# EAGLE board shield2 (EAGLE 8.5.2)
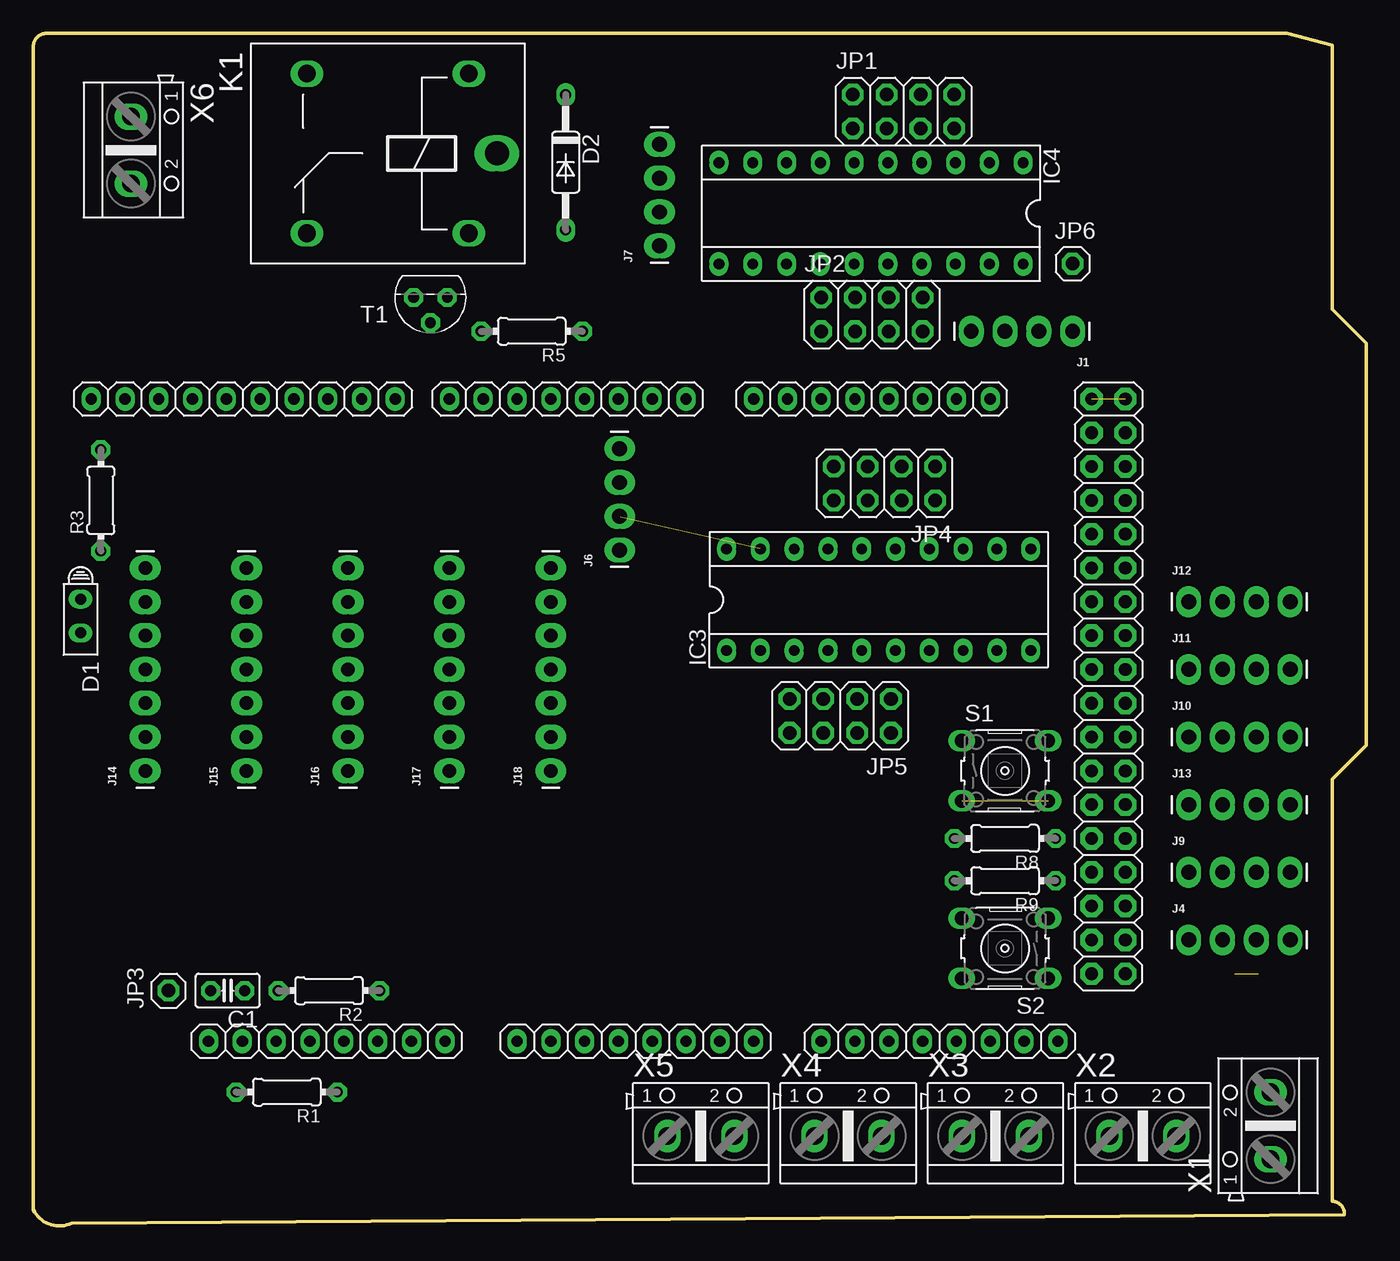
[diagram p0: board, top side]
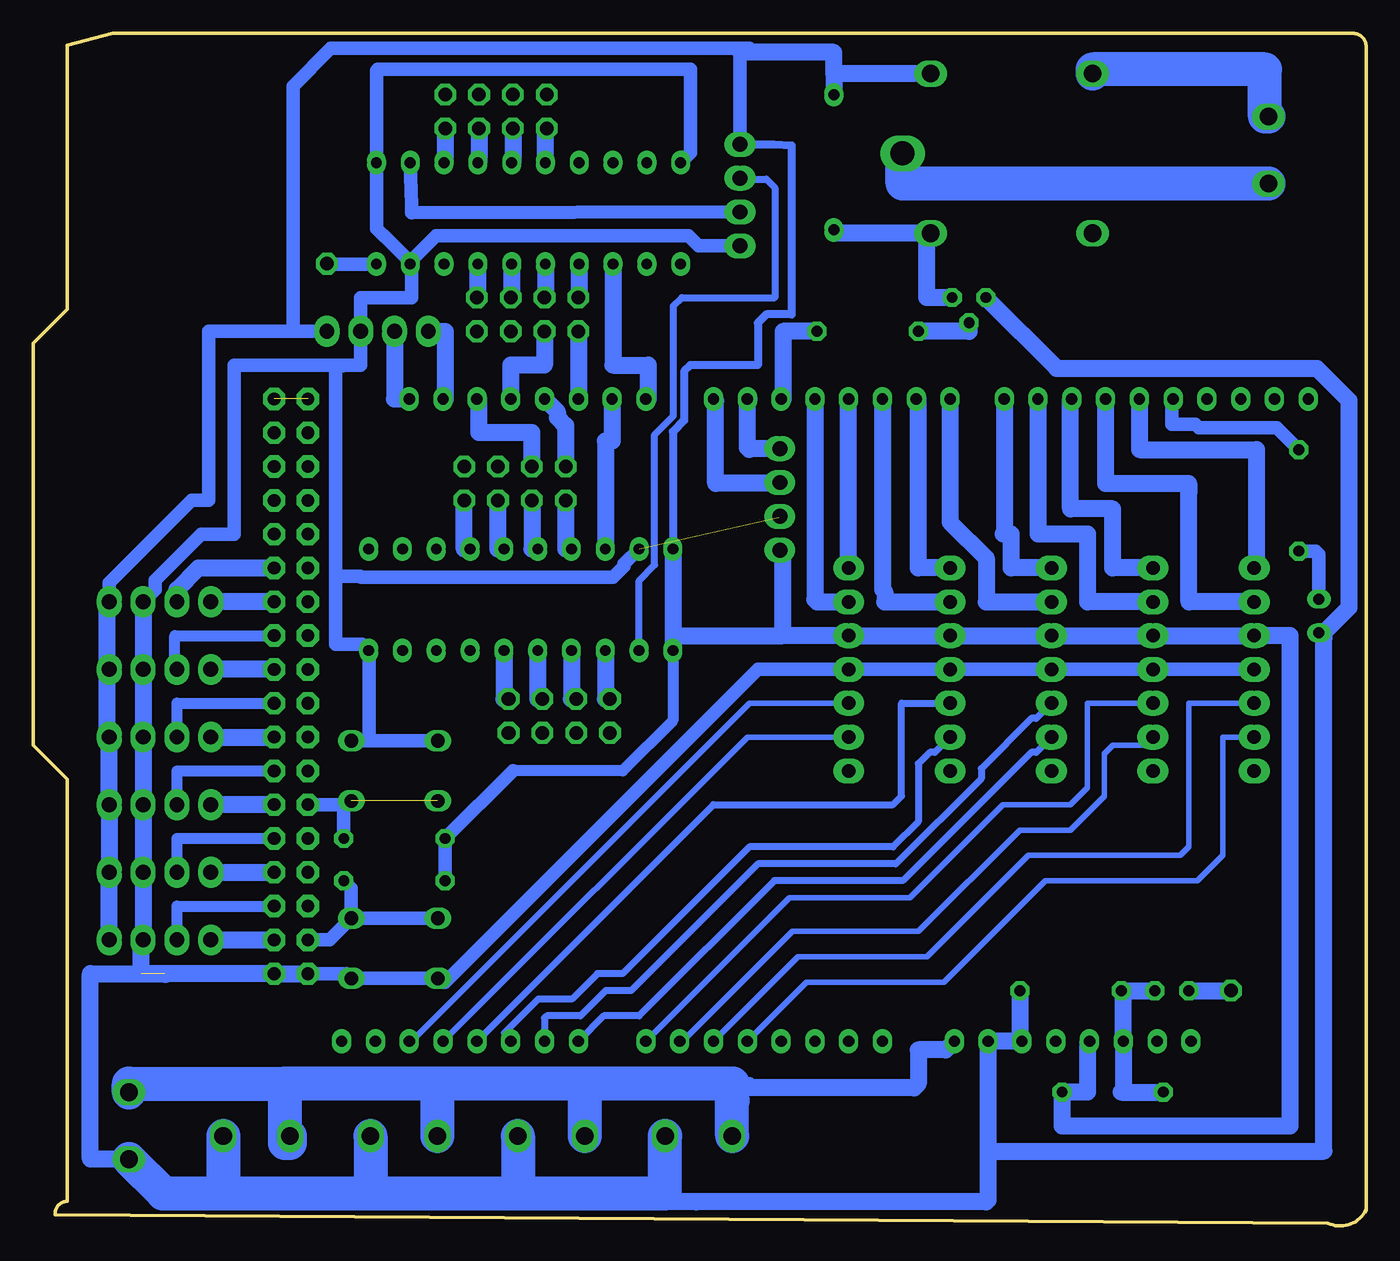
[diagram p1: board, bottom side, seen from below]

Size 100.17 x 89.6 mm. Coordinates in mm from the lower left corner, seen from the top.
Outline: 94.21,89.6 97.64,88.71 97.64,68.86 100.17,66.32 100.17,36.09 97.64,33.55 97.64,1.85 arc-90 98.54,0.85 2.9,0.22 arc-90 0,1.22 0,88.6 arc-90 1,89.6 94.21,89.6
Copper layers (1*16): Top 0.035mm / dielectric 1.6mm / Bottom 0.035mm
Design rules "default *": minimum track width 8mil, minimum drill 16mil, track to track 8mil, track to pad 8mil, pad to pad 8mil, via to via 8mil, smd to smd 6mil, copper to edge 20mil, drill to drill 12mil, minimum pad ring 12mil, minimum via ring 8mil, stop-mask expansion 2mil, vias tented up to drill 25mil, thermal gap 8mil
Net classes: 0 default: width 0.203 mm, drill 0.406 mm, clearance 0.203 mm; 1 USB: width 0.203 mm, drill 0.406 mm, clearance 0.203 mm; 2 gnd: width 0.203 mm, drill 0.406 mm, clearance 0.203 mm; 3 usbvcc: width 0.203 mm, drill 0.406 mm, clearance 0.203 mm; 4 USBpair: width 0.254 mm, drill 0.406 mm, clearance 0.61 mm

## Footprints (pad centres in the part's own frame; a part is rotated, then mirrored left to right if it is on the bottom)
1X08 = drill 0.85 pad 1.422 long: 1 -8.89,0; 2 -6.35,0; 3 -3.81,0; 4 -1.27,0; 5 1.27,0; 6 3.81,0; 7 6.35,0; 8 8.89,0
C025-025X050 = drill 0.813 octagon: 1 -1.27,0; 2 1.27,0
HLMP6 = drill 0.813 long: A -1.27,0; K 1.27,0
DO35-10 = drill 0.813 long: A 5.08,0; C -5.08,0
SOCKET-20 = drill 0.813 long: 1 -11.43,-3.81; 2 -8.89,-3.81; 3 -6.35,-3.81; 4 -3.81,-3.81; 5 -1.27,-3.81; 6 1.27,-3.81; 7 3.81,-3.81; 8 6.35,-3.81; 9 8.89,-3.81; 10 11.43,-3.81; 11 11.43,3.81; 12 8.89,3.81; 13 6.35,3.81; 14 3.81,3.81; 15 1.27,3.81; 16 -1.27,3.81; 17 -3.81,3.81; 18 -6.35,3.81; 19 -8.89,3.81; 20 -11.43,3.81
1X04_LONGPADS = drill 1.118 pad 1.88 long: 1 0,0; 2 2.54,0; 3 5.08,0; 4 7.62,0
1X07_LONGPADS = drill 1.016 pad 1.88 long: 1 0,0; 2 2.54,0; 3 5.08,0; 4 7.62,0; 5 10.16,0; 6 12.7,0; 7 15.24,0
2X04 = drill 1.016 octagon: 1 -3.81,-1.27; 2 -3.81,1.27; 3 -1.27,-1.27; 4 -1.27,1.27; 5 1.27,-1.27; 6 1.27,1.27; 7 3.81,-1.27; 8 3.81,1.27
1X01 = drill 1.016 octagon: 1 0,0
ZF112 = drill 1.321 long: 1 -6.096,5.994; 2 -6.096,-5.994; O 6.096,5.994; S 6.096,-5.994 | drill 1.803 long: P -8.204,0
1X10 = drill 0.85 pad 1.422 long: 1 -11.43,0; 2 -8.89,0; 3 -6.35,0; 4 -3.81,0; 5 -1.27,0; 6 1.27,0; 7 3.81,0; 8 6.35,0; 9 8.89,0; 10 11.43,0
0204/7 = drill 0.813 octagon: 1 -3.81,0; 2 3.81,0
B3F-10XX = drill 1.016 long: 1 -3.251,2.261; 2 3.251,2.261; 3 -3.251,-2.261; 4 3.251,-2.261
TO92 = drill 0.813 octagon: 1 1.27,0; 2 0,1.905; 3 -1.27,0
AK500/2 = drill 1.321 long: 1 -2.515,0; 2 2.515,0
2X18 = drill 0.95 pad 1.676 octagon: 1 -21.59,-1.27; 2 -21.59,1.27; 3 -19.05,-1.27; 4 -19.05,1.27; 5 -16.51,-1.27; 6 -16.51,1.27; 7 -13.97,-1.27; 8 -13.97,1.27; 9 -11.43,-1.27; 10 -11.43,1.27; 11 -8.89,-1.27; 12 -8.89,1.27; 13 -6.35,-1.27; 14 -6.35,1.27; 15 -3.81,-1.27; 16 -3.81,1.27; 17 -1.27,-1.27; 18 -1.27,1.27; 19 1.27,-1.27; 20 1.27,1.27; 21 3.81,-1.27; 22 3.81,1.27; 23 6.35,-1.27; 24 6.35,1.27; 25 8.89,-1.27; 26 8.89,1.27; 27 11.43,-1.27; 28 11.43,1.27; 29 13.97,-1.27; 30 13.97,1.27; 31 16.51,-1.27; 32 16.51,1.27; 33 19.05,-1.27; 34 19.05,1.27; 35 21.59,-1.27; 36 21.59,1.27

## Placement (x,y rotation side)
ADCH  8x1F-H8.5  [1X08]  68.11,13.87 0 top
ADCL  8x1F-H8.5  [1X08]  45.24,13.87 0 top
C1  [C025-025X050]  14.61,17.68 180 top
COMMUNICATION  8x1F-H8.5  [1X08]  63.02,62.13 180 top
D1  HLMP6  [HLMP6]  3.56,45.82 270 top
D2  1N4446  [DO35-10]  40.01,79.91 270 top
IC3  [SOCKET-20]  63.53,47.04 0 top
IC4  [SOCKET-20]  62.96,76.07 180 top
J1  [1X04_LONGPADS]  78.11,67.21 180 top
J4  [1X04_LONGPADS]  86.83,21.49 0 top
J6  [1X04_LONGPADS]  44.07,50.78 90 top
J7  [1X04_LONGPADS]  47.07,73.64 90 top
J9  [1X04_LONGPADS]  86.83,26.57 0 top
J10  [1X04_LONGPADS]  86.83,36.73 0 top
J11  [1X04_LONGPADS]  86.83,41.81 0 top
J12  [1X04_LONGPADS]  86.83,46.89 0 top
J13  [1X04_LONGPADS]  86.83,31.65 0 top
J14  [1X07_LONGPADS]  8.41,34.19 90 top
J15  [1X07_LONGPADS]  16.04,34.19 90 top
J16  [1X07_LONGPADS]  23.66,34.19 90 top
J17  [1X07_LONGPADS]  31.27,34.19 90 top
J18  [1X07_LONGPADS]  38.9,34.19 90 top
JP1  [2X04]  65.41,83.72 0 top
JP2  [2X04]  63.02,68.48 0 top
JP3  [1X01]  10.16,17.68 90 top
JP4  [2X04]  63.98,55.78 180 top
JP5  [2X04]  60.65,38.32 180 top
JP6  [1X01]  78.11,72.29 0 top
K1  ZF112  [ZF112]  26.64,80.57 180 top
POWER  8x1F-H8.5  [1X08]  22.07,13.87 180 top
PWMH  10x1F-H8.5  [1X10]  15.78,62.13 180 top
PWML  8x1F-H8.5  [1X08]  40.16,62.13 180 top
R1  [0204/7]  19.05,10.06 180 top
R2  [0204/7]  22.23,17.68 180 top
R3  [0204/7]  5.08,54.51 90 top
R5  [0204/7]  37.47,67.21 180 top
R8  [0204/7]  73.03,29.11 180 top
R9  [0204/7]  73.03,25.93 180 top
S1  [B3F-10XX]  73.03,34.19 0 top
S2  [B3F-10XX]  73.03,20.85 180 top
T1  BC547  [TO92]  29.84,69.75 180 top
X1  [AK500/2]  92.99,7.53 90 top
X2  [AK500/2]  83.39,6.77 0 top
X3  [AK500/2]  72.31,6.77 0 top
X4  [AK500/2]  61.24,6.77 0 top
X5  [AK500/2]  50.16,6.77 0 top
X6  [AK500/2]  7.34,80.82 270 top
XIO  18x2F-H8.5  [2X18]  80.81,40.54 270 top

## Library data of the parts
ADCH ADCL COMMUNICATION POWER PWMH PWML XIO = SmartPrj
C1 R1-R3 R5 R8 R9 = rcl
D1 = display-hp; MF: AGILENT TECHNOLOGIES; MPN: HLMP-6500; OC_FARNELL: 1652490; OC_NEWARK: 40K0088
D2 = diode
IC3 IC4 = ic-package
J1 J4 J6 J7 J9-J13 = SparkFun-Connectors; PROD_ID: CONN-09696
J14-J18 = SparkFun-Connectors
JP1-JP6 = pinhead
K1 = relay; OC_FARNELL: unknown; OC_NEWARK: unknown
S1 S2 = switch-omron; MPN: B3F-1000; OC_FARNELL: 176432; OC_NEWARK: 36M3542
T1 = transistor
X1-X6 = con-ptr500; OC_FARNELL: unknown; OC_NEWARK: unknown

## Nets
GND: D1.K IC3.10 IC3.19 IC4.1 IC4.10 IC4.19 J1.2 J4.3 J6.2 J7.1 J9.3 J10.3 J11.3 J12.3 J13.3 J14.4 J15.4 J16.4 J17.4 J18.4 POWER.2 POWER.3 R2.1 S1.1 S1.2 S2.1 S2.2 T1.1 X1.1 X2.2 X3.2 X4.2 X5.2 XIO.35 XIO.36
N$1: J14.6 PWMH.4
N$3: K1.S X6.1
N$4: K1.P X6.2
N$5: J4.1 XIO.34
N$6: J4.2 XIO.32
N$7: J15.6 PWMH.2
N$8: J9.1 XIO.30
N$9: COMMUNICATION.3 JP4.5
N$10: J9.2 XIO.28
N$11: J13.2 XIO.24
N$12: POWER.1 X1.2 X2.1 X3.1 X4.1 X5.1
N$13: J13.1 XIO.26
N$14: J10.2 XIO.20
N$15: J10.1 XIO.22
N$16: J11.2 XIO.16
N$17: J11.1 XIO.18
N$18: J12.2 XIO.12
N$19: R5.2 T1.2
N$20: C1.2 JP3.1
N$21: J16.7 PWMH.1
N$22: J14.7 PWMH.5
N$23: J15.7 PWMH.3
N$24: J17.7 PWML.7
N$25: J16.6 PWML.8
N$26: J17.6 PWML.6
N$27: J18.6 PWML.4
N$28: ADCL.6 J14.3
N$29: ADCL.5 J14.2
N$30: ADCH.6 J18.3
N$31: ADCH.5 J18.2
N$32: ADCH.4 J17.3
N$33: D1.A R3.1
N$34: ADCH.3 J17.2
N$35: ADCH.2 J16.3
N$36: ADCH.1 J16.2
N$37: ADCL.8 J15.3
N$38: PWMH.6 R3.2
N$39: C1.1 POWER.6 R1.2 R2.2
N$40: ADCL.7 J15.2
N$41: J18.7 PWML.5
N$42: COMMUNICATION.1 J1.3
N$43: IC4.17 JP2.8
N$44: IC4.16 JP2.6
N$45: IC4.15 JP2.4
N$46: IC4.14 JP2.2
N$47: IC3.6 JP5.1
N$48: IC3.5 JP5.3
N$49: IC3.4 JP5.5
N$50: IC3.3 JP5.7
N$51: IC3.17 JP4.8
N$52: IC3.16 JP4.6
N$53: IC3.15 JP4.4
N$54: IC3.14 JP4.2
N$55: IC4.3 JP1.7
N$56: IC4.4 JP1.5
N$57: IC4.5 JP1.3
N$58: IC4.6 JP1.1
N$59: COMMUNICATION.7 IC3.18
N$60: J6.4 PWML.2
N$61: J6.3 PWML.1
N$62: COMMUNICATION.6 JP2.1
N$63: COMMUNICATION.2 J1.4
N$64: COMMUNICATION.4 JP2.3
N$65: COMMUNICATION.5 JP4.7
N$66: IC3.2 J7.3
N$67: IC4.2 J7.2
N$68: D2.A K1.1 T1.3
N$69: R8.1 S1.3 S1.4 XIO.25
N$70: IC4.20 JP6.1
N$71: XIO.1 XIO.2
N$73: PWML.3 R5.1
N$74: R9.1 S2.3 S2.4 XIO.33
N$75: J12.1 XIO.14
N$76: COMMUNICATION.8 IC4.13
VCC: D2.C IC3.1 IC3.20 J1.1 J4.4 J6.1 J7.4 J9.4 J10.4 J11.4 J12.4 J13.4 J14.5 J15.5 J16.5 J17.5 J18.5 K1.2 POWER.5 R1.1 R8.2 R9.2

## Tracks (layer width: path | path; a pad name or v marks a point on that pad's centre or on a via)
GND  (2 unrouted)
  Bottom 0.61: 54.61,50.88 IC3.19
  Bottom 1.016: J14.4 J15.4 J16.4 J17.4 J18.4 45.72,41.81 69.22,18.31 69.49,18.31 S2.2 S2.1 76.63,18.95 XIO.35 | IC4.10 50.8,80.61 50.8,86.89 74.3,86.89 74.39,86.8 IC4.1 74.39,74.92 73.86,74.4 73.8,74.4 71.85,72.45 | 71.85,72.45 IC4.19 71.75,72.17 71.75,69.75 75.56,69.75 J1.2 75.56,64.67 76.83,64.67 | J7.1 50.18,73.64 50.94,74.4 69.9,74.4 71.85,72.45 | S1.1 74.93,36.45 | 74.93,36.45 S1.2 | 74.93,36.45 74.93,43.2 IC3.10 75.45,43.71 77.47,43.71 77.47,48.79 | J12.3 91.03,47.78 91.03,48.51 87.57,51.97 85.09,51.97 85.09,64.67 76.83,64.67 | 77.47,48.79 77.47,64.62 76.89,64.62 76.83,64.67 | IC3.19 55.76,49.73 55.76,49.55 56.59,48.72 75.55,48.72 75.63,48.79 77.47,48.79
  Bottom 1.27: J11.3 92.08,41.81 | J12.3 J11.3 | J11.3 J10.3 J13.3 J9.3 J4.3 92.08,21.49 92.08,18.95 XIO.36 XIO.35 | X1.1 95.89,5.01 95.89,18.95 90.29,18.95 90.23,18.89 | R2.1 26.04,14.03 POWER.3 POWER.2 28.41,5.61 | J6.2 44.15,53.24 | 28.41,5.61 28.41,1.96 28.57,1.8 50.34,1.8 52.7,1.82 | 52.7,1.82 | 52.7,1.82 52.7,2.44 | 28.41,5.61 3.17,5.61 3.17,44.17 | 3.17,44.17 D1.K | T1.1 23.25,64.43 3.7,64.43 1.29,62.02 1.29,46.45 3.17,44.57 3.17,44.17
  Bottom 2.54: X1.1 90.42,2.44 85.72,2.44 | 85.72,2.44 74.93,2.44 | 74.93,2.44 64.14,2.44 | 64.14,2.44 52.7,2.44 52.7,6.74 X5.2 | X4.2 63.75,2.82 64.14,2.44 | X3.2 74.83,2.54 74.93,2.44 | X2.2 85.9,2.62 85.72,2.44
N$1
  Bottom 1.27: J14.6 13.32,46.89 13.32,55.14 13.34,55.14 13.34,55.78 19.59,55.78 PWMH.4
N$3
  Bottom 2.54: X6.1 7.62,83.34 7.62,86.89 20.55,86.89 K1.S
N$4
  Bottom 2.54: X6.2 34.85,78.31 K1.P
N$5
  Bottom 1.27: J4.1 XIO.34
N$6
  Bottom 0.813: J4.2 89.38,24.03 XIO.32
N$7
  Bottom 1.27: PWMH.2 24.67,51.97 20.94,51.97 20.94,46.89 J15.6
N$8
  Bottom 1.27: J9.1 XIO.30 81.92,26.57
N$9
  Bottom 1.27: COMMUNICATION.3 66.67,62.13 66.67,59.59 62.7,59.59 JP4.5
N$10
  Bottom 0.813: J9.2 89.38,29.11 XIO.28
N$11
  Bottom 0.813: J13.2 89.38,34.19 XIO.24
N$12
  Bottom 1.016: 46.35,10.69 46.67,10.38 47.62,9.42
  Bottom 1.27: POWER.1 31.59,13.23 33.66,13.23 33.66,10.69 33.97,10.38 46.67,10.38
  Bottom 2.54: X5.1 47.65,9.42 47.62,9.42 47.62,10.69 59.05,10.69 | 59.05,10.69 69.85,10.69 | 69.85,10.69 81.28,10.69 | 81.28,10.69 81.28,6.25 80.87,6.25 X2.1 | X1.2 92.99,10.69 81.28,10.69 | X4.1 58.73,10.36 59.05,10.69 | X3.1 69.8,10.64 69.85,10.69
N$13
  Bottom 1.27: XIO.26 J13.1
N$14
  Bottom 0.813: J10.2 89.38,39.27 XIO.20
N$15
  Bottom 1.27: J10.1 XIO.22
N$16
  Bottom 0.813: J11.2 89.53,41.81 89.53,44.35 XIO.16
N$17
  Bottom 1.27: XIO.18 J11.1
N$18
  Bottom 1.27: J12.2 89.38,47.8 87.75,49.43 XIO.12
N$19
  Bottom 1.27: T1.2 29.84,67.21 R5.2
N$20
  Bottom 1.27: C1.2 JP3.1
N$21
  Bottom 1.27: J16.7 26.67,49.43 26.67,51.97 27.21,51.97 | PWMH.1 27.21,51.97 | 27.21,51.97 27.3,51.97
N$22
  Bottom 1.27: PWMH.5 17.05,58.32 8.26,58.32 8.26,49.43 J14.7
N$23
  Bottom 1.27: J15.7 19.05,49.43 19.05,53.87 22.23,53.87 22.23,62.13 PWMH.3
N$24
  Bottom 1.27: J17.7 33.66,49.43 33.66,62.13 PWML.7
N$25
  Bottom 1.27: PWML.8 31.27,52.88 28.56,50.17 28.56,46.89 J16.6
N$26
  Bottom 1.27: PWML.6 36.35,47.8 36.18,47.63 36.18,46.89 J17.6
N$27
  Bottom 1.27: PWML.4 41.44,47.05 41.27,46.89 J18.6
N$28
  Bottom 0.406: ADCL.6 42.7,20.22 33.02,20.22 25.4,27.84 13.97,27.84 13.34,28.47 13.34,39.27 J14.3
N$29
  Bottom 0.406: ADCL.5 42.07,18.31 31.75,18.31 24.13,25.93 12.7,25.93 10.79,27.84 10.79,36.73 J14.2
N$30
  Bottom 0.406: J18.3 46.35,39.27 71.75,13.87 ADCH.6
N$31
  Bottom 0.406: ADCH.5 46.52,36.73 J18.2
N$32
  Bottom 0.508: ADCH.4 49.05,31.65 35.56,31.65 34.92,32.28 34.92,39.27 J17.3
N$33
  Bottom 1.016: R3.1 3.81,50.7 3.56,50.45 D1.A
N$34
  Bottom 0.508: J17.2 32.42,35.59 32.79,35.59 33.66,34.72 33.66,30.38 35.56,28.47 46.35,28.47 55.88,18.95 57.78,18.95 59.69,17.04 62.23,17.04 64.77,14.5 64.77,13.87 ADCH.3
N$35
  Bottom 0.508: J16.3 24.8,38.13 25.17,38.13 28.94,34.36 28.94,33.61 35.34,27.2 45.72,27.2 55.24,17.68 57.15,17.68 59.05,15.77 61.59,15.77 61.76,15.61 ADCH.2
N$36
  Bottom 0.508: J16.2 24.8,35.59 25.17,35.59 34.83,25.93 44.48,25.93 54.64,15.77 57.31,15.77 ADCH.1
N$37
  Bottom 0.406: ADCL.8 43.34,24.66 34.29,24.66 27.3,31.65 22.23,31.65 20.95,32.92 20.95,39.27 J15.3
N$38
  Bottom 1.016: PWMH.6 14.61,62.04 14.61,60.22 12.83,60.22 12.57,59.96 6.72,59.96 R3.2
N$39
  Bottom 1.27: R1.2 18.41,10.06 18.25,10.22 POWER.6 18.25,17.52 R2.2 C1.1
N$40
  Bottom 0.406: J15.2 16.67,36.09 19.05,36.09 19.68,35.46 19.68,32.28 22.23,29.74 26.04,29.74 33.66,22.12 43.14,22.12 51.39,13.87 ADCL.7
N$41
  Bottom 1.27: J18.7 PWML.5
N$42
  Bottom 1.27: J1.3 73.03,62.13 COMMUNICATION.1
N$43
  Bottom 1.27: IC4.17 66.77,69.75 JP2.8
N$44
  Bottom 1.27: IC4.16 64.23,69.75 JP2.6
N$45
  Bottom 1.27: IC4.15 61.69,69.75 JP2.4
N$46
  Bottom 1.27: IC4.14 59.15,69.75 JP2.2
N$47
  Bottom 1.27: IC3.6 64.8,39.59 JP5.1
N$48
  Bottom 1.27: IC3.5 62.26,39.59 JP5.3
N$49
  Bottom 1.27: IC3.4 59.72,39.59 JP5.5
N$50
  Bottom 1.27: IC3.3 57.18,39.59 JP5.7
N$51
  Bottom 1.27: JP4.8 60.16,50.85 IC3.17
N$52
  Bottom 1.27: JP4.6 62.7,50.85 IC3.16
N$53
  Bottom 1.27: IC3.15 65.25,50.85 JP4.4
N$54
  Bottom 1.27: IC3.14 67.78,50.85 JP4.2
N$55
  Bottom 1.27: JP1.7 69.22,79.88 IC4.3
N$56
  Bottom 1.27: JP1.5 66.67,79.88 IC4.4
N$57
  Bottom 1.27: JP1.3 64.14,79.88 IC4.5
N$58
  Bottom 1.27: IC4.6 61.69,82.45 JP1.1
N$59
  Bottom 1.27: COMMUNICATION.7 56.67,58.95 57.18,58.95 IC3.18
N$60
  Bottom 1.27: 46.35,62.13 PWML.2 46.52,58.48 46.35,58.32 46.28,58.4 J6.4
N$61
  Bottom 1.27: J6.3 44.15,55.78 48.9,55.78 48.9,61.97 PWML.1
N$62
  Bottom 1.27: JP2.1 COMMUNICATION.6
N$63
  Bottom 1.27: COMMUNICATION.2 69.22,62.13 69.22,67.21 J1.4
N$64
  Bottom 1.27: JP2.3 61.76,64.67 64.3,64.67 COMMUNICATION.4
N$65
  Bottom 1.27: JP4.7 60.16,60.13 60.78,60.75 60.78,61.16 COMMUNICATION.5
N$66
  Bottom 0.508: IC3.2 54.64,48.49 53.48,49.66 53.48,59.45 52.07,60.86 52.07,69.11 51.44,69.75 44.45,69.75 44.45,78 45.09,78.64 46.99,78.64 J7.3
N$67
  Bottom 1.016: IC4.2 71.75,76.73 71.75,76.1 J7.2
N$68
  Bottom 1.27: T1.3 33.02,69.75 33.02,74.58 K1.1 40.01,74.58 D2.A
N$69  (1 unrouted)
  Bottom 1.016: R8.1 76.83,31.37 S1.4 76.56,31.65 XIO.25
N$70
  Bottom 1.016: JP6.1 78.08,72.26 IC4.20
N$71  (1 unrouted)
N$73
  Bottom 1.27: R5.1 43.81,67.21 43.81,62.13 PWML.3
N$74
  Bottom 1.016: S2.4 S2.3 | S2.3 77.9,21.49 XIO.33 | R9.1 76.28,25.38 S2.3
N$75
  Bottom 1.27: XIO.14 J12.1
N$76
  Bottom 1.27: IC4.13 56.61,64.67 53.98,64.67 53.98,62.13 COMMUNICATION.8
VCC
  Bottom 0.203: 94.61,41.81 J11.4 | 94.61,46.25 94.56,46.28 J12.4 | 47.42,88.46 47.42,88.55 46.99,88.16
  Bottom 0.61: J7.4 44.53,81.26 43.18,81.18 43.18,68.48 45.09,68.48 45.72,67.84 45.72,64.67 50.8,64.67 51.27,64.2 51.27,60.52 52.1,59.68 IC3.20
  Bottom 0.813: IC3.1 52.1,37.97 55.88,34.19 64.14,34.19
  Bottom 1.016: J7.4 47.07,88.09 46.99,88.16 | 46.35,88.46 47.42,88.46 77.81,88.46 80.64,85.62 80.64,67.21 | R9.2 R8.2 64.14,34.19 | J12.4 94.45,48.32 88.27,54.51 87,54.51 87,67.21 80.64,67.21 | 80.64,67.21 J1.1
  Bottom 1.27: J4.4 J9.4 J13.4 J10.4 94.61,36.73 94.61,41.81 94.61,46.25 | K1.2 40.01,86.56 | 40.01,86.56 D2.C | 40.01,86.56 40.01,88.16 46.99,88.16 | POWER.5 20.95,13.71 20.95,10.06 R1.1 22.86,7.52 5.71,7.52 5.71,44.35 J14.5 J15.5 J16.5 J17.5 J18.5 43.81,44.35 | 43.81,44.35 43.81,50.52 J6.1 | 43.81,44.35 52.07,44.35 52.07,43.26 IC3.1 IC3.20